# Altium PCB PowerSupply.PCBDOC
Units mil, origin at the board's own origin, x right, y up, seen from the top; angles counter-clockwise.
Board outline 6000 x 4000 mil, 2 copper layers (Top Layer, Bottom Layer); 7 components, 4 nets, 16 pads, 0 vias.
Unrouted connection lines stored in the file: 12.
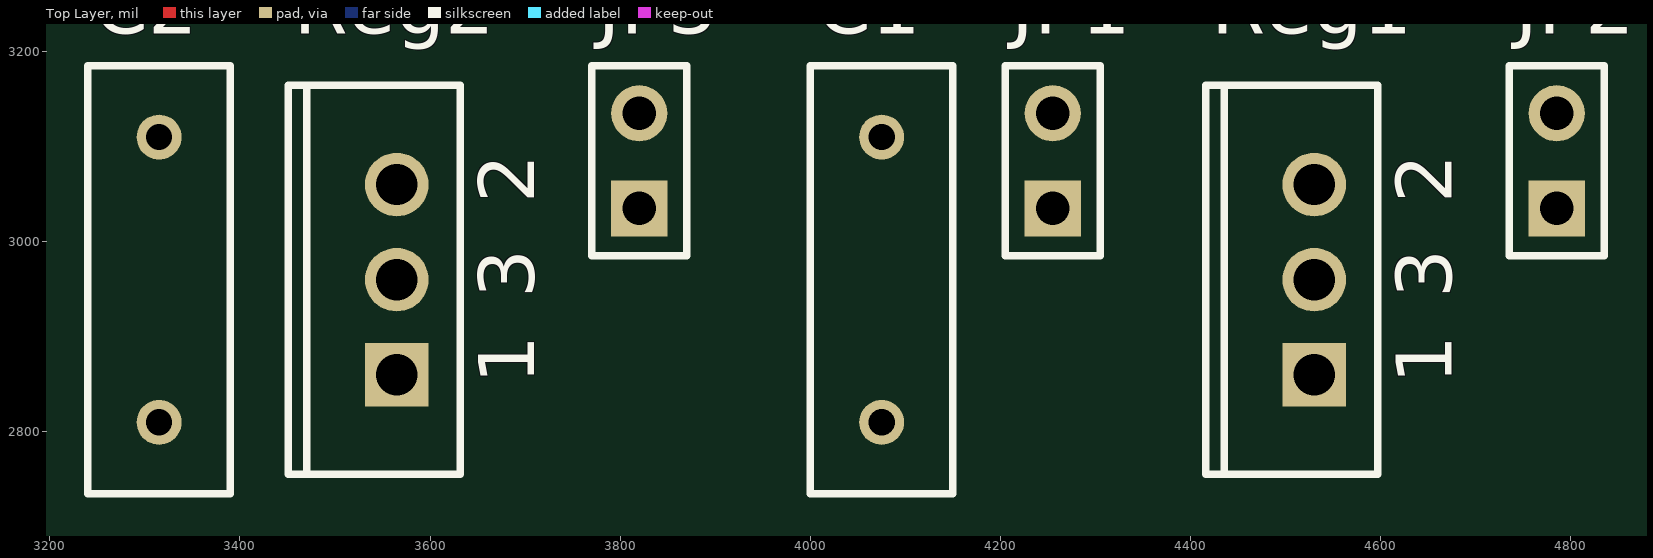
[diagram p0: Top Layer view]
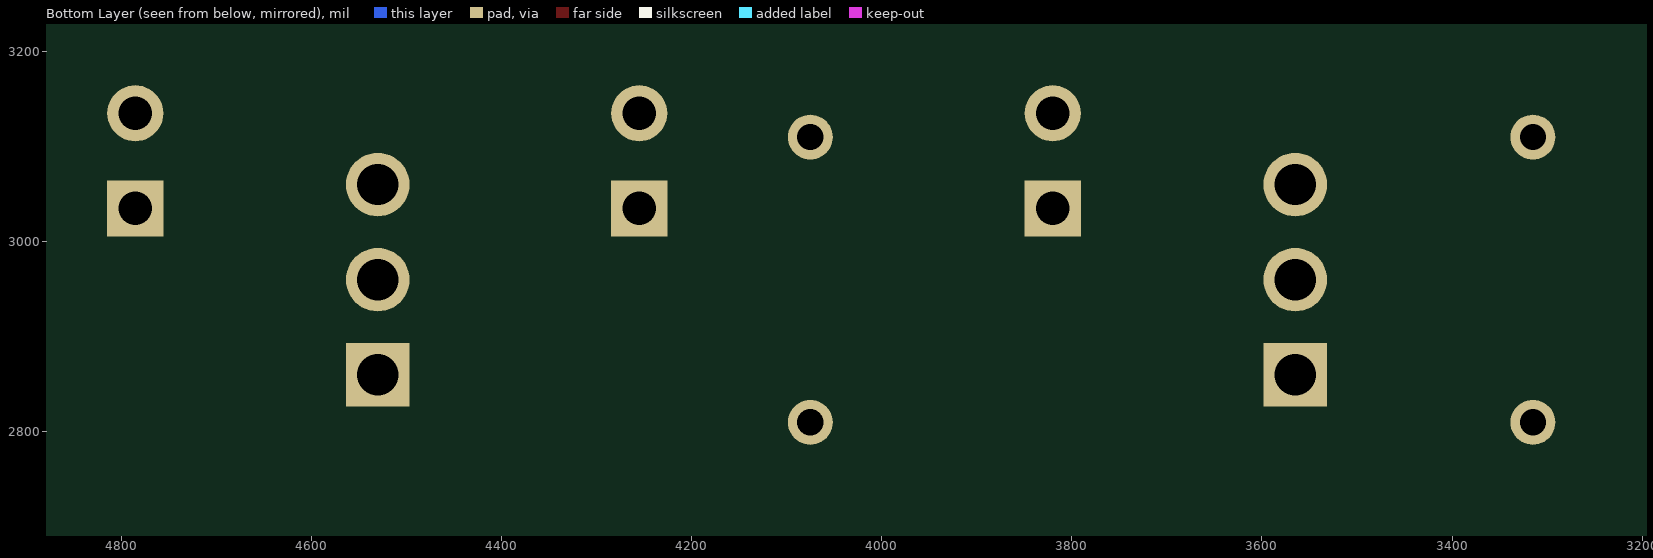
[diagram p1: Bottom Layer view, seen from below]

## Layer stack, top to bottom
Top Layer: signal copper 1.4
Dielectric: dielectric 12.6, FR-4, Dk 4.8
Bottom Layer: signal copper 1.4

## Board outline
1000,1000 7000,1000 7000,5000 1000,5000

## Design rules (kind name [scope] priority, off if disabled: settings)
RoomDefinition PowerSupply [InComponentClass('PowerSupply')] p1: confinementstyle=ConfineIn formatcopy=TRUE outline 3230,2725 4920,2725 4920,3295 3230,3295

## Components (designator, comment, footprint, x,y, rotation, side; value= is the part's Value field where it differs from the comment)
C1 "Cap" RAD-0.3 4075,2960 r90 top
C2 "Cap" RAD-0.3 3315,2960 r90 top
JP1 "Header 2" HDR1X2 4255,3035 r90 top
JP2 "Header 2" HDR1X2 4785,3035 r90 top
JP3 "Header 2" HDR1X2 3820,3035 r90 top
Reg1 "L78M05ABV" TO220V 4530,2960 r90 top
Reg2 "L78M05ABV" TO220V 3565,2960 r90 top

## Footprints (in the part's own frame and the unit in brackets; to place one, negate y for a bottom-side part, rotate by r counter-clockwise, add the part's x,y. Pads: shape width x height; smd on the part's side, far side on the other; paste and mask are expansions set on the pad)
HDR1X2 [mm] "Connector; Header; 2 Position"
  rect 1.5x1.5 hole 0.9: 1(0,0)
  round 1.5 hole 0.9: 2(2.54,0)
  silkscreen extent -1.27,-1.27 3.81,1.27
RAD-0.3 [mm]
  round 1.2 hole 0.7: 1(-3.81,0) 2(3.81,0)
  silkscreen extent -5.71,-1.91 5.71,1.91
TO220V [mm] "TO, Thru-Hole, Vertical, Heatsink Mounted; 3 In-Line Leads; Pitch 2.54 mm; Pin sequence 1, 3, 2"
  rect 1.7x1.7 hole 1.1: 1(-2.54,0)
  round 1.7 hole 1.1: 2(2.54,0) 3(0,0)
  silkscreen extent -5.2,-1.7 5.2,2.9

## Part data
C1 C2: "Capacitor"
JP1 JP2 JP3: "Header, 2-Pin"
Reg1 Reg2: "Precision 500mA Regulator"

## Nets (pads, with @x,y where several pads share a name; then routed paths per layer and width w, separated by ;. In a path a pad name is that pad's centre, name@x,y a point inside that pad or via, vN(x,y) a via of type N, cw(c..) or ccw(c..) an arc to the next point about the centre after c; other vN are vias at no path point)
NetC1_1: C1.1 C2.1 JP1.1 JP2.2 JP3.2 Reg1.3 Reg2.3
NetC1_2: C1.2 JP2.1 Reg1.2 Reg2.1
NetC2_2: C2.2 JP3.1 Reg2.2
NetJP1_2: JP1.2 Reg1.1

## Text inside footprints (layer, text, board x,y; h text height)
Reg1: Top Overlay "1" at 4674.69,2850.16 h59.06 r90; Top Overlay "2" at 4674.69,3040.32 h59.06 r90; Top Overlay "3" at 4674.69,2940.32 h59.06 r90
Reg2: Top Overlay "1" at 3709.69,2850.16 h59.06 r90; Top Overlay "2" at 3709.68,3040.32 h59.06 r90; Top Overlay "3" at 3709.68,2940.32 h59.06 r90